# EAGLE board pcb v3 (EAGLE 9.7.0)
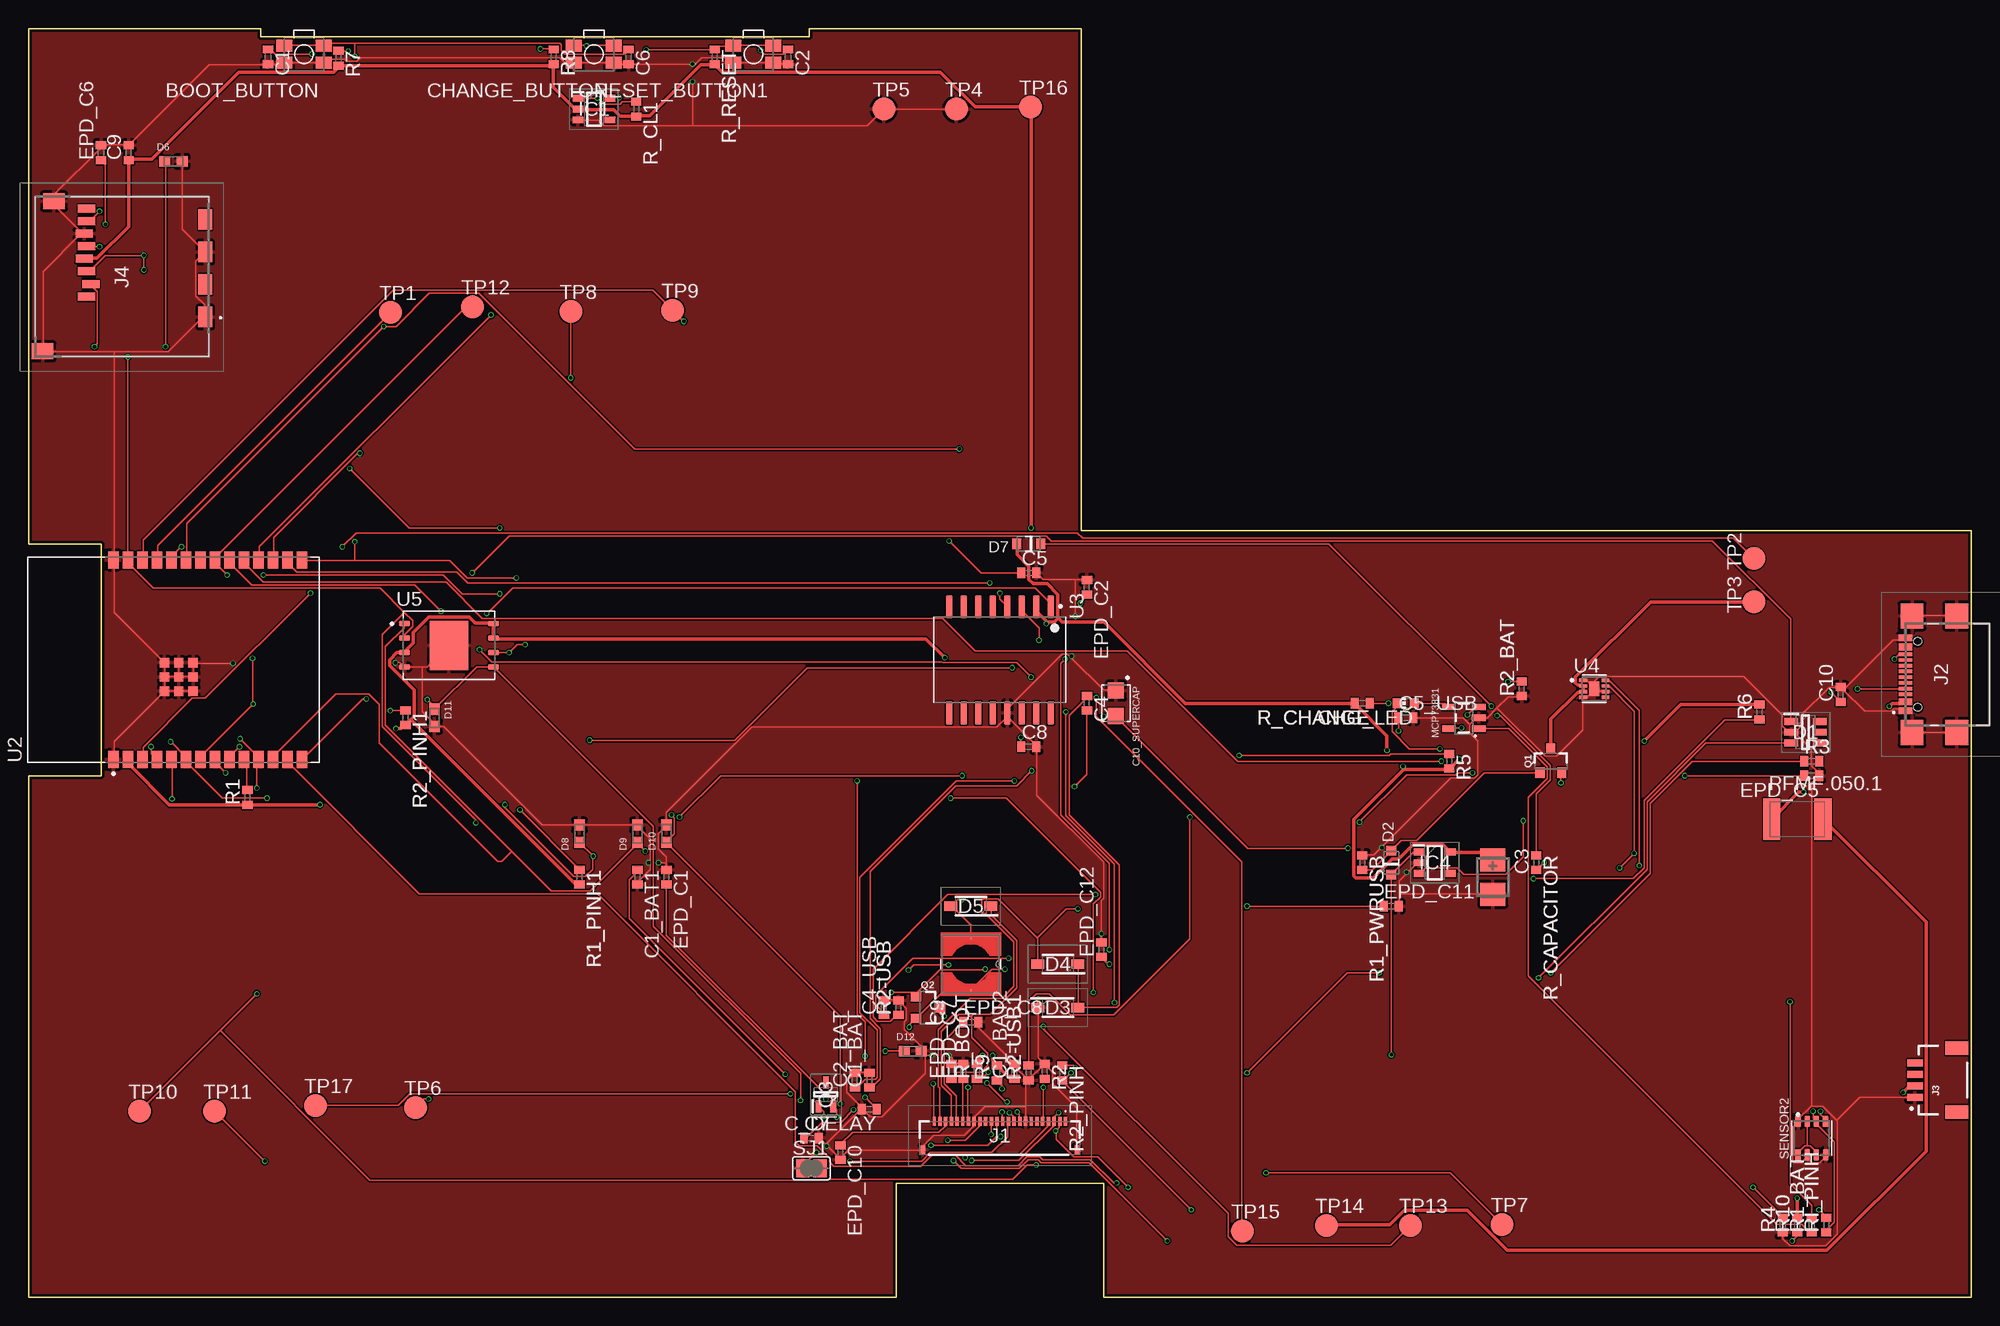
[diagram p0: board, top side]
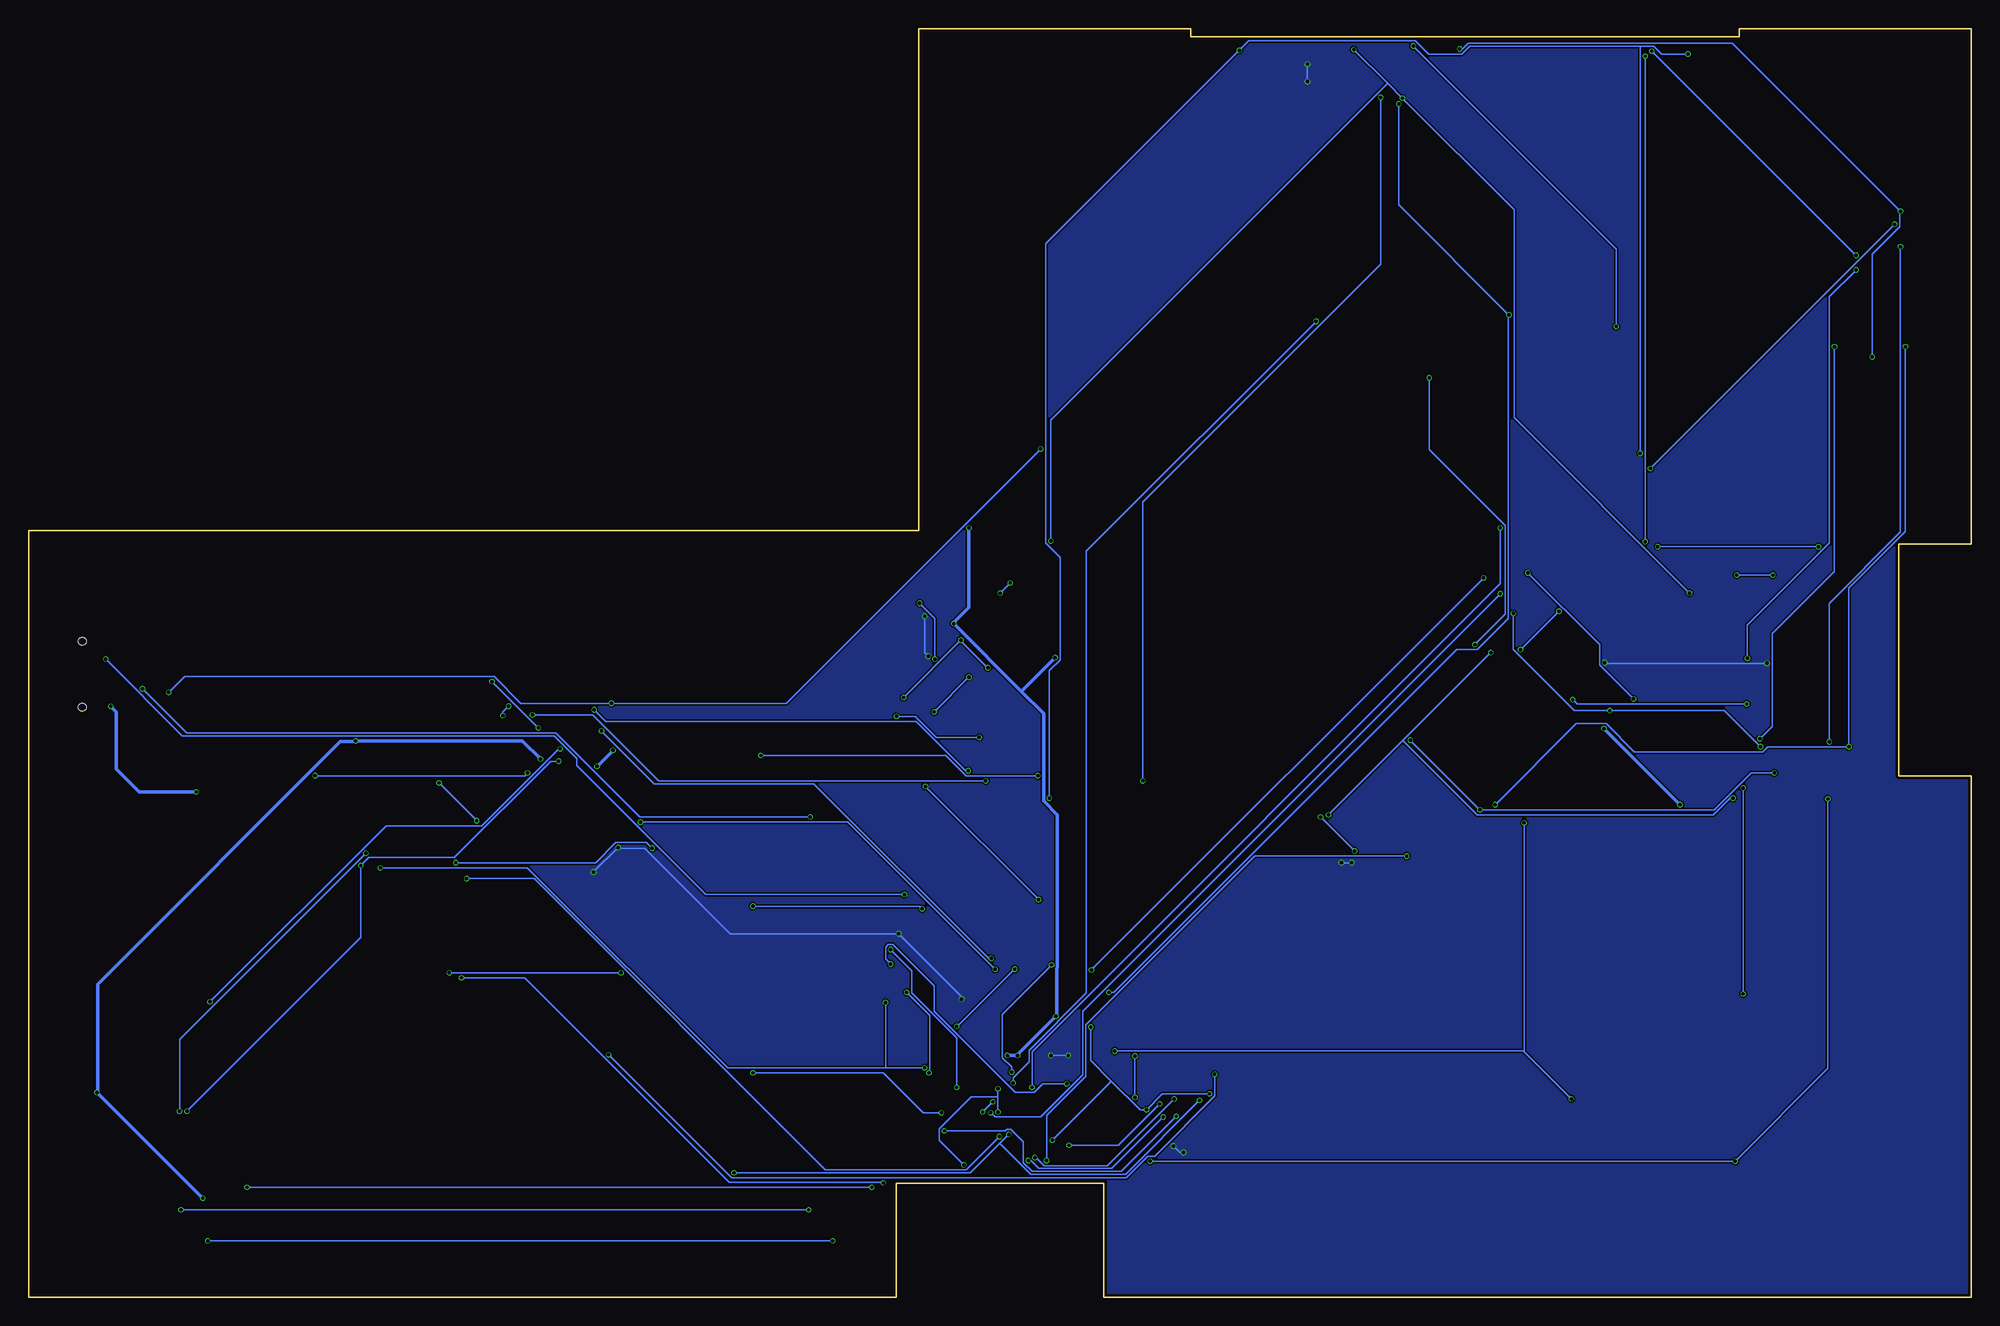
[diagram p1: board, bottom side, seen from below]

Size 170.2 x 111.2 mm. Coordinates in mm from the lower left corner, seen from the top.
Outline: 0,111.2 0,66.04 6.35,66.04 6.35,45.72 0,45.72 0,0 76,0 76,10 94.2,10 94.2,0 170.2,0 170.2,67.2 92.2,67.2 92.2,111.2 68.39,111.2 68.39,110.49 20.32,110.49 20.32,111.2 0,111.2
Copper layers (1*16): Top 0.035mm / dielectric 1.6mm / Bottom 0.035mm
Design rules "jlcpcb-2layers.dru": minimum track width 5mil, minimum drill 0.3mm, track to track 5mil, track to pad 5mil, pad to pad 5mil, via to via 5mil, smd to smd 5mil, copper to edge 0.2mm, drill to drill 6mil, minimum pad ring 10mil, minimum via ring 3mil, stop-mask expansion 4mil, vias tented up to drill 0mil, thermal gap 10mil
Net classes: 1 traseedeputere: width 0.3 mm

## Footprints (pad centres in the part's own frame; a part is rotated, then mirrored left to right if it is on the bottom)
MYBUTTON = smd 1.4 x 1.05: 1 1.75,0.75; 2 -1.75,0.75; 3 -1.75,-0.75; 4 1.75,-0.75
ESP32_WROVER_EAGLE-LTSPICE_C0402 = smd 0.7 x 0.9: 1 -0.65,0; 2 0.65,0
EAGLE-LTSPICE_C0402 = smd 0.7 x 0.9: 1 -0.65,0; 2 0.65,0
RCL_CT3528 = smd 2 x 2.2: + -1.5,0; - 1.5,0
CAPCP3225X100N = smd 1.4 x 1.4: 1 -1.1,0; 2 1.1,0
ADAFRUIT_CHIP-LED0603 = smd 0.8 x 0.8: A 0,-0.75; C 0,0.75
SOT95P280X145-6N = smd 1.2 x 0.6: 1 -1.25,0.95; 2 -1.25,0; 3 -1.25,-0.95; 4 1.25,-0.95; 5 1.25,0; 6 1.25,0.95
ESP32_WROVER_AVX---SD0805S020S1R0_AVX_SD0805S020S1R0_0 = smd 0.8 x 0.9: 1 -1.05,0; 2 1.05,0
SOD3716X135N = smd 1.15 x 0.8: 1 -1.75,0; 2 1.75,0
DIOC1608X36N = smd 0.97 x 0.94: 1 -0.75,0; 2 0.75,0
SOT95P280X120-5N = smd 0.9 x 0.6: 1 -1.4,0.95; 2 -1.4,0; 3 -1.4,-0.95; 4 1.4,-0.95; 5 1.4,0.95
FH34SRJ24S05SH99 = smd 0.3 x 0.8: 1 5.75,1.45; 2 5.25,1.45; 3 4.75,1.45; 4 4.25,1.45; 5 3.75,1.45; 6 3.25,1.45; 7 2.75,1.45; 8 2.25,1.45; 9 1.75,1.45; 10 1.25,1.45; 11 0.75,1.45; 12 0.25,1.45; 13 -0.25,1.45; 14 -0.75,1.45; 15 -1.25,1.45; 16 -1.75,1.45; 17 -2.25,1.45; 18 -2.75,1.45; 19 -3.25,1.45; 20 -3.75,1.45; 21 -4.25,1.45; 22 -4.75,1.45; 23 -5.25,1.45; 24 -5.75,1.45 | smd 0.4 x 0.8: MP1 6.75,-1.05; MP2 -6.75,-1.05
SAMACSYS_PARTS_USB4110GFA = smd 0.3 x 1.15: A1 -3.35,3.678; A4 -2.55,3.678; A5 -1.25,3.678; A6 -0.25,3.678; A7 0.25,3.678; A8 1.25,3.678; A9 2.55,3.678; A12 3.35,3.678; B1 3.05,3.678; B4 2.25,3.678; B5 1.75,3.678; B6 0.75,3.678; B7 -0.75,3.678; B8 -1.75,3.678; B9 -2.25,3.678; B12 -3.05,3.678 | smd 2.18 x 2: MP1 -5.11,-0.827; MP2 5.11,-0.827; MP3 -5.11,3.103; MP4 5.11,3.103 | hole 0.65: -2.89,2.603; 2.89,2.603
JST04_1MM_RA = smd 0.6 x 1.35: 1 -1.5,0; 2 -0.5,0; 3 0.5,0; 4 1.5,0 | smd 1.2 x 2: NC1 2.8,-3.675; NC2 -2.8,-3.675
112ATAARR03ATTEND = smd 1.8 x 1.2: G1 10.6,10.4; G2 4.9,10.4; S1 7.75,10.4; S2 2.05,10.4 | smd 1.4 x 1.9: G3 13.6,-3.85; G4 0.45,-2.85 | smd 0.7 x 1.5: P1 8.8,0; P2 7.7,0.4; P3 6.6,0; P4 5.5,-0.2; P5 4.4,0; P6 3.3,-0.2; P7 2.2,0; P8 1.1,0
IND_4828-WE-TPC_WRE = smd 0.127 x 0.127: 1 -2.286,0; 2 2.286,0
ESP32_WROVER_SPARKFUN-IC-POWER_SOT23-5 = smd 0.55 x 1.2: 1 -0.95,-1.3; 2 0,-1.3; 3 0.95,-1.3; 4 0.95,1.3; 5 -0.95,1.3
ESP32C6_VARISTOR_CT/CN1812 = smd 1.5 x 3.6: 1 -2.25,0; 2 2.25,0
ESP32_WROVER_SPARKFUN-DISCRETESEMI_SOT23-3 = smd 0.8 x 0.9: 1 -0.95,-1; 2 0.95,-1; 3 0,1.1
SOT65P210X110-3N = smd 1.05 x 0.5: 1 -1.05,0.65; 2 -1.05,-0.65; 3 1.05,0
ESP32_WROVER_EAGLE-LTSPICE_R0402 = smd 0.7 x 0.9: 1 -0.65,0; 2 0.65,0
ESP32_WROVER_BME680_PSON80P300X300X100-8N = smd 1.016 x 0.5: 1 1.458,1.2; 2 1.458,0.4; 3 1.458,-0.4; 4 1.458,-1.2; 5 -1.458,-1.22; 6 -1.458,-0.4; 7 -1.458,0.4; 8 -1.458,1.2
SJ = smd 1.168 x 1.6: 1 -0.762,0; 2 0.762,0
TP20R = smd 2 x 2: TP 0,0
XCVR_ESP32-C6-WROOM-1-N8 = smd 1.5 x 0.9: 1 -8.75,5.26; 2 -8.75,3.99; 3 -8.75,2.72; 4 -8.75,1.45; 5 -8.75,0.18; 6 -8.75,-1.09; 7 -8.75,-2.36; 8 -8.75,-3.63; 9 -8.75,-4.9; 10 -8.75,-6.17; 11 -8.75,-7.44; 12 -8.75,-8.71; 13 -8.75,-9.98; 14 -8.75,-11.25; 15 8.75,-11.25; 16 8.75,-9.98; 17 8.75,-8.71; 18 8.75,-7.44; 19 8.75,-6.17; 20 8.75,-4.9; 21 8.75,-3.63; 22 8.75,-2.36; 23 8.75,-1.09; 24 8.75,0.18; 25 8.75,1.45; 26 8.75,2.72; 27 8.75,3.99; 28 8.75,5.26 | smd 0.8 x 0.8: 29_1 -2.755,0.79; 29_2 -1.505,0.79; 29_3 -0.255,0.79; 29_4 -2.755,-0.46; 29_5 -1.505,-0.46; 29_6 -0.255,-0.46; 29_7 -2.755,-1.71; 29_8 -1.505,-1.71; 29_9 -0.255,-1.71
SOIC127P1032X265-16N = smd 2.05 x 0.59: 1 -4.655,4.445; 2 -4.655,3.175; 3 -4.655,1.905; 4 -4.655,0.635; 5 -4.655,-0.635; 6 -4.655,-1.905; 7 -4.655,-3.175; 8 -4.655,-4.445; 9 4.655,-4.445; 10 4.655,-3.175; 11 4.655,-1.905; 12 4.655,-0.635; 13 4.655,0.635; 14 4.655,1.905; 15 4.655,3.175; 16 4.655,4.445
SON50P200X200X80-9N = smd 0.76 x 0.27: 1 -0.985,0.75; 2 -0.985,0.25; 3 -0.985,-0.25; 4 -0.985,-0.75; 5 0.985,-0.75; 6 0.985,-0.25; 7 0.985,0.25; 8 0.985,0.75 | smd 0.9 x 1.3: 9 0,0
SON127P600X800X80-9N = smd 0.94 x 0.44: 1 -3.895,1.905; 2 -3.895,0.635; 3 -3.895,-0.635; 4 -3.895,-1.905; 5 3.895,-1.905; 6 3.895,-0.635; 7 3.895,0.635; 8 3.895,1.905 | smd 3.4 x 4.3: 9 0,0

## Placement (x,y rotation side)
BOOT_BUTTON  [MYBUTTON]  24.13,108.94 180 top
C1  100nF  [ESP32_WROVER_EAGLE-LTSPICE_C0402]  20.97,108.71 270 top
C1_BAT  4.7uF  [ESP32_WROVER_EAGLE-LTSPICE_C0402]  73.66,19.05 90 top
C1_BAT1  4.7uF  [EAGLE-LTSPICE_C0402]  53.34,36.83 270 top
C1_BAT2  4.7uF  [ESP32_WROVER_EAGLE-LTSPICE_C0402]  86.36,19.82 90 top
C2  100nF  [ESP32_WROVER_EAGLE-LTSPICE_C0402]  66.53,108.71 270 top
C2_BAT  4.7uF  [ESP32_WROVER_EAGLE-LTSPICE_C0402]  72.39,19.05 90 top
C3  100uF TANT  [RCL_CT3528]  128.27,36.83 270 top
C4  4.7uF/25V  [ESP32_WROVER_EAGLE-LTSPICE_C0402]  92.71,52.07 270 top
C4_USB  100nF  [EAGLE-LTSPICE_C0402]  74.93,25.4 90 top
C5  1uF  [ESP32_WROVER_EAGLE-LTSPICE_C0402]  87.63,63.5 0 top
C5_USB  4.7uF  [EAGLE-LTSPICE_C0402]  120.65,50.8 0 top
C6  100nF  [ESP32_WROVER_EAGLE-LTSPICE_C0402]  52.56,108.71 270 top
C7  10uF  [ESP32_WROVER_EAGLE-LTSPICE_C0402]  68.58,13.97 0 top
C8  100nF  [ESP32_WROVER_EAGLE-LTSPICE_C0402]  87.63,48.26 0 top
C9  100nF  [EAGLE-LTSPICE_C0402]  8.78,100.32 90 top
C10  100nF  [ESP32_WROVER_EAGLE-LTSPICE_C0402]  158.75,52.84 90 top
C10_SUPERCAP  CPH3225A  [CAPCP3225X100N]  95.25,52.07 270 top
C_DELAY  100nF  [ESP32_WROVER_EAGLE-LTSPICE_C0402]  73.66,16.51 180 top
CHANGE_BUTTON  [MYBUTTON]  49.53,108.94 180 top
CHG_LED  [ADAFRUIT_CHIP-LED0603]  120.65,52.07 90 top
D1  USBLC6-2SC6Y  [SOT95P280X145-6N]  155.67,49.53 0 top
D2  ESP32_WROVER_AVX---SD0805S020S1R0_AVX_SD0805S020S1R0_0_0AVX_SD0805S020S1R0_0_0  [ESP32_WROVER_AVX---SD0805S020S1R0_AVX_SD0805S020S1R0_0]  119.38,38.1 90 top
D3  MBR0530  [SOD3716X135N]  90.17,25.4 0 top
D4  MBR0530  [SOD3716X135N]  90.17,29.21 180 top
D5  MBR0530  [SOD3716X135N]  82.55,34.29 180 top
D6  PGB1010603MR  [DIOC1608X36N]  12.7,99.56 0 top
D7  ESP32_WROVER_AVX---SD0805S020S1R0_AVX_SD0805S020S1R0_0_0AVX_SD0805S020S1R0_0_0  [ESP32_WROVER_AVX---SD0805S020S1R0_AVX_SD0805S020S1R0_0]  87.63,66.04 180 top
D8  PGB1010603MR  [DIOC1608X36N]  48.26,40.64 90 top
D9  PGB1010603MR  [DIOC1608X36N]  53.34,40.64 90 top
D10  PGB1010603MR  [DIOC1608X36N]  55.88,40.64 90 top
D11  PGB1010603MR  [DIOC1608X36N]  35.56,50.8 270 top
D12  PGB1010603MR  [DIOC1608X36N]  77.47,21.59 0 top
EPD_C1  1uF/50V  [ESP32_WROVER_EAGLE-LTSPICE_C0402]  55.88,36.83 270 top
EPD_C2  1uF/50V  [ESP32_WROVER_EAGLE-LTSPICE_C0402]  92.71,62.23 270 top
EPD_C5  01uf/50V  [ESP32_WROVER_EAGLE-LTSPICE_C0402]  156.21,45.72 180 top
EPD_C6  1uF/50V  [ESP32_WROVER_EAGLE-LTSPICE_C0402]  6.35,100.33 90 top
EPD_C7  1uF/50V  [ESP32_WROVER_EAGLE-LTSPICE_C0402]  81.89,19.82 90 top
EPD_C8  1uF/50V  [ESP32_WROVER_EAGLE-LTSPICE_C0402]  82.55,24.13 0 top
EPD_C9  1uF/50V  [ESP32_WROVER_EAGLE-LTSPICE_C0402]  80.86,19.82 90 top
EPD_C10  1uf/50V  [ESP32_WROVER_EAGLE-LTSPICE_C0402]  71.12,12.7 270 top
EPD_C11  1uF/50V  [ESP32_WROVER_EAGLE-LTSPICE_C0402]  119.38,34.29 0 top
EPD_C12  1uF/50V  [ESP32_WROVER_EAGLE-LTSPICE_C0402]  93.98,30.48 90 top
IC1  BD5229G-TR  [SOT95P280X120-5N]  49.53,104.14 0 top
IC4  XC6220A331MR-G  [SOT95P280X120-5N]  123.19,38.1 0 top
J1  FH34SRJ-24S-0.5SH_99_  [FH34SRJ24S05SH99]  85.09,13.97 0 top
J2  SAMACSYS_PARTS_USB4110-GF-A  [SAMACSYS_PARTS_USB4110GFA]  168.1,54.61 90 top
J3  QWIIC_RIGHT_ANGLE  [JST04_1MM_RA]  165.25,19.05 90 top
J4  112A-TAAR-R03_ATTEND  [112ATAARR03ATTEND]  5.08,96.52 270 top
L1  68uH  [IND_4828-WE-TPC_WRE]  82.55,29.21 270 top
MCP73831  ESP32_WROVER_SPARKFUN-IC-POWER_MCP73831  [ESP32_WROVER_SPARKFUN-IC-POWER_SOT23-5]  125.73,50.8 90 top
PFMF.050.1  ESP32C6_VARISTORCN1812  [ESP32C6_VARISTOR_CT/CN1812]  154.94,41.91 0 top
Q1  20V/4.2A/52mΩ/1.4W  [ESP32_WROVER_SPARKFUN-DISCRETESEMI_SOT23-3]  133.35,46.99 0 top
Q2  20V/4.2A/52mΩ/1.4W  [ESP32_WROVER_SPARKFUN-DISCRETESEMI_SOT23-3]  78.74,25.4 270 top
Q3  SI1308EDL-T1-GE3  [SOT65P210X110-3N]  69.85,17.78 90 top
R1  10k  [ESP32_WROVER_EAGLE-LTSPICE_R0402]  19.17,43.82 90 top
R1_BAT  200  [ESP32_WROVER_EAGLE-LTSPICE_R0402]  156.21,6.35 90 top
R1_PINH1  10K  [ESP32_WROVER_EAGLE-LTSPICE_R0402]  48.26,36.83 270 top
R1_PWRUSB  100k  [ESP32_WROVER_EAGLE-LTSPICE_R0402]  116.84,38.1 270 top
R2  2.2  [ESP32_WROVER_EAGLE-LTSPICE_R0402]  89.02,19.82 270 top
R2-USB  5k1  [ESP32_WROVER_EAGLE-LTSPICE_R0402]  76.2,25.4 90 top
R2-USB1  5k1  [ESP32_WROVER_EAGLE-LTSPICE_R0402]  87.6,19.69 90 top
R2_BAT  2k  [ESP32_WROVER_EAGLE-LTSPICE_R0402]  130.81,53.34 90 top
R2_PINH  10K  [ESP32_WROVER_EAGLE-LTSPICE_R0402]  90.55,19.68 270 top
R2_PINH1  10K  [ESP32_WROVER_EAGLE-LTSPICE_R0402]  33.02,50.8 270 top
R3  0.47  [ESP32_WROVER_EAGLE-LTSPICE_R0402]  156.21,46.99 0 top
R4  10K  [ESP32_WROVER_EAGLE-LTSPICE_R0402]  153.67,6.35 90 top
R5  10K  [ESP32_WROVER_EAGLE-LTSPICE_R0402]  124.46,46.99 270 top
R6  10K  [ESP32_WROVER_EAGLE-LTSPICE_R0402]  151.63,51.3 90 top
R7  10K  [ESP32_WROVER_EAGLE-LTSPICE_R0402]  27.16,108.61 270 top
R8  10K  [ESP32_WROVER_EAGLE-LTSPICE_R0402]  46,108.71 270 top
R9  10K  [ESP32_WROVER_EAGLE-LTSPICE_R0402]  84.83,19.69 90 top
R10  10K  [ESP32_WROVER_EAGLE-LTSPICE_R0402]  154.94,6.35 90 top
R_BOOT  10K  [ESP32_WROVER_EAGLE-LTSPICE_R0402]  83.09,19.82 90 top
R_CAPACITOR  15  [ESP32_WROVER_EAGLE-LTSPICE_R0402]  132.08,38.1 270 top
R_CHANGE  10K  [ESP32_WROVER_EAGLE-LTSPICE_R0402]  116.84,52.07 180 top
R_CL1  10K  [ESP32_WROVER_EAGLE-LTSPICE_R0402]  53.23,104.13 270 top
R_RESET  10K  [ESP32_WROVER_EAGLE-LTSPICE_R0402]  60.1,108.71 270 top
RESET_BUTTON1  [MYBUTTON]  63.5,108.94 180 top
RI_PINH  10K  [ESP32_WROVER_EAGLE-LTSPICE_R0402]  157.48,6.35 90 top
SENSOR2  BME688  [ESP32_WROVER_BME680_PSON80P300X300X100-8N]  156.21,13.97 90 top
SJ1  [SJ]  68.58,11.32 0 top
TP1  TPTP20R  [TP20R]  31.71,86.32 0 top
TP2  TPTP20R  [TP20R]  151.13,64.77 90 top
TP3  TPTP20R  [TP20R]  151.13,60.96 90 top
TP4  TPTP20R  [TP20R]  81.28,104.14 0 top
TP5  TPTP20R  [TP20R]  74.93,104.14 0 top
TP6  TPTP20R  [TP20R]  33.9,16.64 0 top
TP7  TPTP20R  [TP20R]  129.09,6.4 0 top
TP8  TPTP20R  [TP20R]  47.51,86.4 0 top
TP9  TPTP20R  [TP20R]  56.43,86.51 0 top
TP10  TPTP20R  [TP20R]  9.74,16.32 0 top
TP11  TPTP20R  [TP20R]  16.29,16.32 0 top
TP12  TPTP20R  [TP20R]  38.89,86.82 0 top
TP13  TPTP20R  [TP20R]  121.04,6.32 0 top
TP14  TPTP20R  [TP20R]  113.69,6.32 0 top
TP15  TPTP20R  [TP20R]  106.34,5.82 0 top
TP16  TPTP20R  [TP20R]  87.77,104.32 0 top
TP17  TPTP20R  [TP20R]  25.14,16.82 0 top
U2  ESP32-C6-WROOM-1-N8  [XCVR_ESP32-C6-WROOM-1-N8]  12.7,55.88 90 top
U3  DS3231SN#  [SOIC127P1032X265-16N]  85.09,55.88 270 top
U4  MAX17048G+T10  [SON50P200X200X80-9N]  137.16,53.34 0 top
U5  W25Q512JVEIQ  [SON127P600X800X80-9N]  36.83,57.15 0 top

## Library data of the parts
BOOT_BUTTON CHANGE_BUTTON CHG_LED PFMF.050.1 RESET_BUTTON1 SJ1 TP1-TP17 = DeskAssistant v19 v1
C1 C1_BAT C1_BAT1 C1_BAT2 C2 C2_BAT C4 C4_USB C5 C5_USB C6-C10 C_DELAY EPD_C1 EPD_C2 EPD_C5-EPD_C12 = DeskAssistant v19 v1; SPICEMODEL: NONE; SPICEPREFIX: C
C3 = DeskAssistant v19 v1; SPICEPREFIX: C
C10_SUPERCAP = DeskAssistant v19 v1; AVAILABILITY: Not in stock; CHECK_PRICES: https://www.snapeda.com/parts/CPH3225A/Seiko+Instruments/view-part/?ref=eda; DESCRIPTION: 11 mF (EDLC) Supercapacitor 3.3 V 1210 (3225 Metric) - -; MF: Seiko Instruments; MP: CPH3225A; PACKAGE: 1210 Seiko; PRICE: None; PURCHASE-URL: https://www.snapeda.com/api/url_track_click_mouser/?unipart_id=562593&manufacturer=Seiko Instruments&part_name=CPH3225A&search_term=None; SNAPEDA_LINK: https://www.snapeda.com/parts/CPH3225A/Seiko+Instruments/view-part/?ref=snap
D1 = DeskAssistant v19 v1; AVAILABILITY: In Stock; CHECK_PRICES: https://www.snapeda.com/parts/USBLC6-2SC6Y/STMicroelectronics/view-part/?ref=eda; DESCRIPTION: 17V Clamp 5A (8/20µs) Ipp Tvs Diode Surface Mount SOT-23-6; MF: STMicroelectronics; MP: USBLC6-2SC6Y; PACKAGE: SOT-23-6 STMicroelectronics; PRICE: None; SNAPEDA_LINK: https://www.snapeda.com/parts/USBLC6-2SC6Y/STMicroelectronics/view-part/?ref=snap
D2 D7 = DeskAssistant v19 v1; CENTROID_NOT_SPECIFIED: No; DATASHEET: http://datasheets.avx.com/schottky.pdf; DIGIKEY_DESCRIPTION: DIODE SCHOTTKY 20V 1A 0805; DIGIKEY_PART_NUMBER: 478-7800-1-ND; LEAD_FREE: yes; MF: AVX; MOUSER_PART_NUMBER: 581-SD0805S020S1R0; PACKAGE: 0805 (2012 metric); PREFIX: D; ROHS: yes; TEMPERATURE_RANGE_HIGH: +125°C; TEMPERATURE_RANGE_LOW: -55°C
D3-D5 = DeskAssistant v19 v1; AVAILABILITY: In Stock; CHECK_PRICES: https://www.snapeda.com/parts/MBR0530/Onsemi/view-part/?ref=eda; DESCRIPTION: Diode Schottky 30 V 500mA Surface Mount SOD-123; MF: ON Semiconductor; MP: MBR0530; PACKAGE: SOD-123-2 ON Semiconductor; PRICE: None; PURCHASE-URL: https://www.snapeda.com/api/url_track_click_mouser/?unipart_id=179458&manufacturer=ON Semiconductor&part_name=MBR0530&search_term=None; SNAPEDA_LINK: https://www.snapeda.com/parts/MBR0530/Onsemi/view-part/?ref=snap
D6 D8-D12 = DeskAssistant v19 v1; AVAILABILITY: In Stock; CHECK_PRICES: https://www.snapeda.com/parts/PGB1010603MR/Littelfuse/view-part/?ref=eda; DESCRIPTION: 150V (Typ) Clamp - Ipp Tvs Diode Surface Mount 0603 (1608 Metric); MF: Littelfuse Inc.; MP: PGB1010603MR; PACKAGE: 0603 Littelfuse Inc.; PRICE: None; PURCHASE-URL: https://www.snapeda.com/api/url_track_click_mouser/?unipart_id=5659453&manufacturer=Littelfuse Inc.&part_name=PGB1010603MR&search_term=None; SNAPEDA_LINK: https://www.snapeda.com/parts/PGB1010603MR/Littelfuse/view-part/?ref=snap
IC1 IC4 = DeskAssistant v19 v1; DESCRIPTION: LDO Voltage Regulators; HEIGHT: 1.2mm; MANUFACTURER_NAME: Torex; MANUFACTURER_PART_NUMBER: XC6220A331MR-G; MOUSER_PART_NUMBER: 865-XC6220A331MR-G; MOUSER_PRICE-STOCK: https://www.mouser.co.uk/ProductDetail/Torex-Semiconductor/XC6220A331MR-G?qs=AsjdqWjXhJ8ZSWznL1J0gg%3D%3D
J1 = DeskAssistant v19 v1; DESCRIPTION: 24 Position FFC, FPC Connector Contacts, Top and Bottom 0.020" (0.50mm) Surface Mount, Right Angle; HEIGHT: 1.1mm; MANUFACTURER_NAME: Hirose; MANUFACTURER_PART_NUMBER: FH34SRJ-24S-0.5SH(99); MOUSER_PART_NUMBER: 798-FH34SRJ24S05SH99; MOUSER_PRICE-STOCK: https://www.mouser.co.uk/ProductDetail/Hirose-Connector/FH34SRJ-24S-0.5SH99?qs=vcbW%252B4%252BSTIpKBl5ap9J8Fw%3D%3D
J2 = DeskAssistant v19 v1; DESCRIPTION: CONN USB 2.0 TYPE-C R/A SMT; HEIGHT: 3.26mm; MANUFACTURER_NAME: GCT (GLOBAL CONNECTOR TECHNOLOGY); MANUFACTURER_PART_NUMBER: USB4110-GF-A; MOUSER_PART_NUMBER: 640-USB4110-GF-A; MOUSER_PRICE-STOCK: https://www.mouser.co.uk/ProductDetail/GCT/USB4110-GF-A?qs=KUoIvG%2F9IlYiZvIXQjyJeA%3D%3D
J3 = DeskAssistant v19 v1; PROD_ID: CONN-13694
J4 = DeskAssistant v19 v1; DESCRIPTION: Micro SD Card Socket, Push-Push Type, Top Mount, SMT, H=1.83mm, 10u; HEIGHT: 1.9mm; MANUFACTURER_NAME: ATTEND; MANUFACTURER_PART_NUMBER: 112A-TAAR-R03 ATTEND
L1 = DeskAssistant v19 v1; COPYRIGHT: Copyright (C) 2024 Ultra Librarian. All rights reserved.; MANUFACTURER_PART_NUMBER: 744043680; MFR_NAME: Wurth Electronics
MCP73831 = DeskAssistant v19 v1; PROD_ID: IC-09995
Q1 Q2 = DeskAssistant v19 v1; PROD_ID: TRAN-14388
Q3 = DeskAssistant v19 v1; AVAILABILITY: In Stock; CHECK_PRICES: https://www.snapeda.com/parts/SI1308EDL-T1-GE3/Vishay+Siliconix/view-part/?ref=eda; DESCRIPTION: Si1308EDL-T1-GE3 N-channel MOSFET Transistor, 1.5 A, 30 V, 3-Pin SC-70 | Siliconix / Vishay SI1308EDL-T1-GE3; MF: Vishay Siliconix; MP: SI1308EDL-T1-GE3; PACKAGE: SOT-323 Vishay Semiconductor; PRICE: None; PURCHASE-URL: https://www.snapeda.com/api/url_track_click_mouser/?unipart_id=274603&manufacturer=Vishay Siliconix&part_name=SI1308EDL-T1-GE3&search_term=None; SNAPEDA_LINK: https://www.snapeda.com/parts/SI1308EDL-T1-GE3/Vishay+Siliconix/view-part/?ref=snap
R1 R1_BAT R1_PINH1 R1_PWRUSB R2 R2-USB R2-USB1 R2_BAT R2_PINH R2_PINH1 R3-R10 R_BOOT R_CAPACITOR R_CHANGE R_CL1 R_RESET RI_PINH = DeskAssistant v19 v1; SPICEMODEL: NONE; SPICEPREFIX: R
SENSOR2 = DeskAssistant v19 v1; AVAILABILITY: Unavailable; DESCRIPTION: Integrated Environmental Unit; MF: Bosch Sensortec; MP: BME680; PACKAGE: LGA-8 Bosch Tools; PRICE: None
U2 = DeskAssistant v19 v1; AVAILABILITY: In Stock; CHECK_PRICES: https://www.snapeda.com/parts/ESP32-C6-WROOM-1-N8/Espressif+Systems/view-part/?ref=eda; DESCRIPTION: Multiprotocol Modules ESP32-C6 module, Wi-Fi 6 in 2.4 GHz band, Bluetooth 5, Zigbee 3.0 and Thread. ESP34-WROOM Compatible - ENGINEERING SAMPLE; MF: Espressif Systems; MP: ESP32-C6-WROOM-1-N8; PACKAGE: None; PRICE: None; SNAPEDA_LINK: https://www.snapeda.com/parts/ESP32-C6-WROOM-1-N8/Espressif+Systems/view-part/?ref=snap
U3 = DeskAssistant v19 v1; AVAILABILITY: In Stock; CHECK_PRICES: https://www.snapeda.com/parts/DS3231SN%23/Analog+Devices/view-part/?ref=eda; DESCRIPTION: Extremely Accurate I²C-Integrated RTC/TCXO/Crystal; MF: Analog Devices; MP: DS3231SN#; PACKAGE: SOIC-16 Maxim; PRICE: None; PURCHASE-URL: https://www.snapeda.com/api/url_track_click_mouser/?unipart_id=99048&manufacturer=Analog Devices&part_name=DS3231SN#&search_term=None; SNAPEDA_LINK: https://www.snapeda.com/parts/DS3231SN%23/Analog+Devices/view-part/?ref=snap
U4 = DeskAssistant v19 v1; AVAILABILITY: In Stock; CHECK_PRICES: https://www.snapeda.com/parts/MAX17048G+T10/Analog+Devices/view-part/?ref=eda; DESCRIPTION: 3µA 1-Cell/2-Cell Fuel Gauge with ModelGauge; MF: Analog Devices; MP: MAX17048G+T10; PACKAGE: TDFN-8 Maxim; PRICE: None; PURCHASE-URL: https://www.snapeda.com/api/url_track_click_mouser/?unipart_id=329239&manufacturer=Analog Devices&part_name=MAX17048G+T10&search_term=None; SNAPEDA_LINK: https://www.snapeda.com/parts/MAX17048G+T10/Analog+Devices/view-part/?ref=snap
U5 = DeskAssistant v19 v1; AVAILABILITY: In Stock; CHECK_PRICES: https://www.snapeda.com/parts/W25Q512JVEIQ/Winbond+Electronics/view-part/?ref=eda; DESCRIPTION: FLASH - NOR Memory IC 512Mb (64M x 8) SPI - Quad I/O 133 MHz 8-WSON (8x6); MF: Winbond Electronics; MP: W25Q512JVEIQ; PACKAGE: Package; PRICE: None; SNAPEDA_LINK: https://www.snapeda.com/parts/W25Q512JVEIQ/Winbond+Electronics/view-part/?ref=snap

## Nets
3V3 [traseedeputere]: C1_BAT2.1 C3.+ C9.1 D7.2 IC1.2 IC4.5 J3.2 J4.P4 Q2.3 R1.1 R1_PINH1.2 R2_PINH1.2 R5.2 R6.2 R7.2 R8.2 R9.2 R10.2 R_BOOT.2 R_CHANGE.2 R_CL1.2 R_RESET.2 TP16.TP U2.2 U3.2 U5.3 U5.7 U5.8
32KHZ: R2_PINH1.1 U2.9 U3.1
DN: J2.A7
DP: J2.A6
EPD_3V3: C7.1 EPD_C5.2 J1.15 J1.16 L1.2 Q2.2 TP17.TP
EPD_3V3_C: Q2.1 R_CL1.1 TP13.TP U2.18
EPD_BUSY: J1.9 TP9.TP U2.26
EPD_CS: D6.1 J1.12 R9.1 TP10.TP U2.11
EPD_DC: J1.11 TP11.TP U2.5
EPD_RST: J1.10 TP12.TP U2.21
FLASH_CS: D9.1 R5.1 U2.12 U5.1
GDR: J1.2 Q3.1 R4.2
GND: BOOT_BUTTON.1 BOOT_BUTTON.2 C1.2 C1_BAT1.2 C1_BAT2.2 C1_BAT.2 C2.2 C2_BAT.2 C3.- C4_USB.2 C5.2 C5_USB.2 C6.2 C7.2 C8.2 C9.2 C10.2 C10_SUPERCAP.1 C_DELAY.2 CHANGE_BUTTON.1 CHANGE_BUTTON.2 D1.2 D3.1 D6.2 D8.2 D9.2 D10.2 D11.2 D12.2 EPD_C1.1 EPD_C2.1 EPD_C5.1 EPD_C6.2 EPD_C7.2 EPD_C8.2 EPD_C9.2 EPD_C10.2 EPD_C11.2 EPD_C12.2 IC1.3 IC4.2 J1.8 J1.17 J1.MP1 J1.MP2 J2.A1 J2.A12 J2.B1 J2.B12 J2.MP1 J2.MP2 J2.MP3 J2.MP4 J3.1 J4.G1 J4.G2 J4.G3 J4.G4 J4.P6 MCP73831.2 R1_PWRUSB.1 R2-USB1.1 R2-USB.2 R2.1 R2_BAT.1 R4.1 RESET_BUTTON1.1 RESET_BUTTON1.2 SENSOR2.1 SENSOR2.5 SENSOR2.7 SJ1.1 TP4.TP TP5.TP U2.1 U2.28 U2.29_1 U2.29_2 U2.29_3 U2.29_4 U2.29_5 U2.29_6 U2.29_7 U2.29_8 U2.29_9 U3.13 U4.1 U4.4 U4.6 U4.9 U5.4 U5.9
GPIO8: R1.2 U2.10
I2C_PW: C1.1 C2.1 R2_PINH.2 RI_PINH.2 U2.17
IC2_PW: SENSOR2.2 SENSOR2.6 SENSOR2.8
INT_RTC: R1_PINH1.1 TP15.TP U2.8 U3.3
IO/BOOT: BOOT_BUTTON.3 BOOT_BUTTON.4 C6.1 R_BOOT.1 U2.15
IO/CHANGE: C10.1 CHANGE_BUTTON.3 CHANGE_BUTTON.4 R_CHANGE.1 U2.23
MISO: D12.1 J4.P7 R8.1 TP6.TP U2.27 U5.2
MOSI: D11.1 J1.14 J4.P3 R7.1 TP7.TP U2.7 U5.5
N$1: J2.B5 R2-USB.1
N$2: J2.A5 R2-USB1.2
N$3: D1.4
N$4: D1.5
N$5: J2.B4
N$6: J2.B7
N$7: J2.B6
N$8: J2.B9
N$9: D1.6
N$10: C4_USB.1 C5_USB.1
N$11: J2.A9
N$12: D2.2 Q1.1 R1_PWRUSB.2
N$13: C1_BAT1.1 D2.1 IC4.1 IC4.3 Q1.2
N$14: MCP73831.1 R1_BAT.1
N$15: R2.2
N$16: C4.2 D5.2 L1.1
N$17: C4.1 D3.2 D4.1
N$18: CHG_LED.C R1_BAT.2
N$19: C1_BAT.1 CHG_LED.A MCP73831.4
N$20: MCP73831.5 R2_BAT.2
N$21: R3.2
N$22: EPD_C1.2 J1.4
N$23: EPD_C2.2 J1.5
N$24: EPD_C6.1 J1.18
N$26: EPD_C7.1 J1.19
N$29: EPD_C8.1 J1.20
N$30: EPD_C10.1 J1.22
N$31: EPD_C12.1 J1.24
N$32: C_DELAY.1 IC1.5
N$37: U3.14
N$43: U3.16
N$44: U3.15
N$45: D7.1 R_CAPACITOR.1
N$62: J3.3
N$63: J3.4
PREVGH: D5.1 EPD_C9.1 J1.21
PREVGL: D4.2 EPD_C11.1 J1.23
RESE: J1.3 Q3.2 R3.1
RESE': SJ1.2
RESET: C5.1 IC1.1 R_RESET.1 RESET_BUTTON1.3 RESET_BUTTON1.4 U2.3
RTC_RST: U2.16 U3.4
RX: TP2.TP U2.24
SCK: D10.1 J1.13 J4.P5 R6.1 TP8.TP U2.6 U5.6
SCL: R2_PINH.1 SENSOR2.4 U2.20 U4.7
SDA: RI_PINH.1 SENSOR2.3 U2.19 U4.8
SRC: Q3.3
SS_SD: D8.1 J4.P2 R10.1 U2.4
TX: TP1.TP U2.25
USB_D+: D1.1 U2.14
USB_D-: D1.3 U2.13
VBAT [traseedeputere]: Q1.3 TP3.TP U4.2 U4.3
VBBAT: C2_BAT.1 MCP73831.3
VBUS [traseedeputere]: PFMF.050.1.2 TP14.TP
VRTC: C8.1 C10_SUPERCAP.2 R_CAPACITOR.2
VUSB [traseedeputere]: J2.A4 PFMF.050.1.1

## Tracks (layer width: path | path; a pad name or v marks a point on that pad's centre or on a via)
3V3  (via drill 0.3)
  Top 0.3: J4.P4 4.89,91.06 5.97,91.06 8.76,93.85 8.76,99.63 C9.1 8.89,99.76 10.79,99.76 18.41,107.38 26.73,107.38 27.18,107.82 R7.2 27.18,107.95 45.91,107.95 45.97,108.01 R8.2 45.97,107.82 45.97,106.05 47.88,104.14 IC1.2 48.26,104.08 51.24,104.08 51.82,103.5 53.21,103.5 R_CL1.2 53.34,103.57 54.42,103.57 58.86,108.01 60.07,108.01 R_RESET.2 60.2,107.95 60.77,107.38 79.88,107.38 82.93,104.33 87.76,104.33 TP16.TP 87.82,104.2 v87.82,67.44 | v154.94,8.7 R10.2 | v164.21,17.97 164.78,18.54 165.23,18.54 J3.2 | C3.+ 128.27,38.35 127.64,38.99 124.65,38.99 IC4.5 124.46,39.12 123.89,39.69 121.28,39.69 120.02,38.42 119.44,38.42 117.79,36.77 116.27,36.77 116.08,36.96 116.08,41.91 120.46,46.29 | 120.46,46.29 124.46,46.29 R5.2 124.59,46.42 v125.35,47.18 | v141.54,48.77 144.72,51.94 151.57,51.94 R6.2 | U2.2 8.76,47.12 8.76,46.74 12.32,43.18 19.11,43.18 R1.1 19.3,43.18 v25.53,43.18 | 33.5,50.64 33.78,50.93 33.78,53.21 31.62,55.37 31.62,55.88 32.26,56.52 U5.3 33.02,56.64 33.72,57.34 33.72,58.29 35.05,59.63 38.61,59.63 39.12,59.12 40.58,59.12 U5.8 40.7,59.05 40.7,57.78 U5.7 40.83,57.72 78.61,57.72 v80.26,56.07 | 33.5,50.64 33.02,50.17 R2_PINH1.2 32.89,50.1 32.64,49.85 v32.19,49.85 | 33.5,50.64 47.94,36.2 48.26,36.2 R1_PINH1.2 | C1_BAT2.1 85.98,19.18 84.84,20.32 R9.2 84.77,20.45 84.45,20.77 v84.45,21.21 | v83.57,21.21 83.12,20.77 83.12,20.51 R_BOOT.2 | v80.2,24.64 79.88,24.96 79.88,25.4 Q2.3 | 90.17,59.5 90.17,61.59 89.22,62.55 88.01,62.55 87.63,62.93 87.63,64.07 86.61,65.09 86.61,66.04 D7.2 | 90.17,59.5 89.85,59.18 89.22,59.18 | 89.22,59.18 88.27,60.13 U3.2
  Top 0.3: 90.17,59.5 90.3,59.44 90.55,59.18 94.23,59.18 101.35,52.07 R_CHANGE.2 116.27,51.94 119,49.21 v119,47.94 | v89.15,59.05 89.22,59.18 | v120.4,46.55 120.4,46.42 120.46,46.29
  Bottom 0.3: v154.94,8.7 v164.21,17.97 164.15,18.1 164.15,27.43 142.88,48.7 141.67,48.7 v141.54,48.77 126.94,48.77 v125.35,47.18 | v32.19,49.85 v25.53,43.18 | v84.45,21.21 v83.57,21.21 83.5,21.34 v80.2,24.64 80.14,24.77 80.14,28.83 80.07,28.89 80.07,42.29 81.28,43.5 81.28,51.18 83.22,53.12 | 83.22,53.12 v89.15,59.05 89.09,59.18 87.82,60.45 v87.82,67.44 | 83.22,53.12 v80.26,56.07 | v119,47.94 v120.4,46.55
32KHZ  (via drill 0.3)
  Top 0.127: v31.69,51.44 33.02,51.44 R2_PINH1.1 | v18.48,48.26 17.65,47.44 17.65,47.18 U2.9 | U3.1 89.53,60.83 88.2,62.17 42.42,62.17 40.2,59.94 v40.13,59.94
  Bottom 0.127: v18.48,48.26 21.65,51.44 v31.69,51.44 34.8,51.44 40.13,56.77 v40.13,59.94
EPD_3V3  (via drill 0.3)
  Top 0.127: J1.15 83.82,15.43 83.38,15.43 J1.16 83.31,15.37 83.31,15.05 82.04,13.78 v80.52,13.78 | C7.1 68.14,13.97 69.53,15.37 71.18,15.37 v72.26,16.45 | v77.15,23.69 77.15,23.88 77.72,24.45 Q2.2 77.79,24.51 80.2,26.92 L1.2 84.38,28.76 v85.53,28.76 | v66.74,17.84 33.4,17.84 32.38,16.83 TP17.TP | v145.1,45.72 EPD_C5.2 | v126.49,45.97 125.22,45.97 125.03,45.78 120.71,45.78 v116.59,41.66
  Bottom 0.127: 75.34,18.96 77.15,20.77 v77.15,23.69 | 75.34,18.96 72.83,16.45 v72.26,16.45 70.87,17.84 v66.74,17.84 | 75.34,18.96 v80.52,13.78 | v145.1,45.72 126.75,45.72 v126.49,45.97 | v116.59,41.66 98.42,41.66 v85.53,28.76
EPD_3V3_C  (via drill 0.3)
  Top 0.127: v88.9,23.75 88.9,23.56 105.09,7.37 105.09,5.33 105.86,4.57 119.32,4.57 121.03,6.29 TP13.TP | v50.16,104.58 51.82,104.58 52.01,104.77 53.21,104.77 R_CL1.1 | v40.51,86.11 20.19,65.79 20.19,64.64 U2.18 | v75.56,26.73 77.79,26.73 Q2.1 77.79,26.35 77.79,26.67 79.82,28.7 83.74,28.7 v83.81,28.77
  Bottom 0.127: v88.9,23.75 88.84,23.75 v83.81,28.77 | v50.16,104.58 50.16,95.76 v40.51,86.11 40.58,86.11 40.58,59.5 43.31,56.77 45.09,56.77 75.12,26.73 v75.56,26.73
EPD_BUSY  (via drill 0.3)
  Top 0.127: v86.61,16.26 86.81,16.07 86.81,15.43 J1.9 | v85.72,17.14 85.6,17.14 v83.95,18.8 | v57.4,85.53 56.45,86.49 TP9.TP 56.39,86.55 54.67,88.27 31.94,88.27 10.03,66.36 10.03,64.64 U2.26
  Bottom 0.127: v85.72,17.14 v86.61,16.26 | v83.95,18.8 83.95,19.24 82.55,20.64 82.55,21.65 77.53,26.67 77.53,65.41 v57.4,85.53
EPD_CS  (via drill 0.3)
  Top 0.127: v85.28,16.26 85.28,15.43 J1.12 | v85.28,18.29 85.28,18.54 84.84,18.99 R9.1 | v12,83.31 12,99.5 D6.1 | v18.54,48.96 20.13,47.37 20.13,47.18 U2.11 20.13,47.12 20,46.99 v20,44.64 | v20,26.61 16.8,23.4 | 16.8,23.4 9.78,16.38 TP10.TP | v88.27,11.62 87.5,11.62 86.23,10.35 70.04,10.35 69.98,10.29 29.91,10.29 16.8,23.4
  Bottom 0.127: v85.28,18.29 85.28,17.59 | 85.28,17.59 v85.28,16.26 | v12,83.31 12,63.63 17.46,58.17 17.46,50.04 v18.54,48.96 | v20,44.64 v20,26.61 | 85.28,17.59 87.63,17.59 90.42,14.8 90.42,13.78 v88.27,11.62
EPD_DC  (via drill 0.3)
  Top 0.127: v71.94,11.94 78.23,11.94 78.99,12.7 84.39,12.7 85.79,14.1 85.79,15.37 J1.11 | v20.7,11.94 16.32,16.32 TP11.TP | v12.57,43.69 12.57,47.12 U2.5
  Bottom 0.127: v71.94,11.94 v20.7,11.94 12.57,20.07 v12.57,43.69
EPD_RST  (via drill 0.3)
  Top 0.127: v85.92,16.19 86.3,15.81 86.3,15.43 J1.10 | v41.27,61.66 37.97,61.66 36.32,63.31 v20.57,63.31 | v17.4,63.31 16.38,64.33 16.38,64.58 U2.21 16.38,64.64 16.38,64.9 38.29,86.8 38.86,86.8 TP12.TP
  Bottom 0.127: v85.92,16.19 85.53,15.81 81.53,15.81 77.85,19.49 77.85,25.08 v41.27,61.66 | v17.4,63.31 v20.57,63.31
FLASH_CS  (via drill 0.3)
  Top 0.127: v106.05,47.5 119.19,47.5 119.32,47.62 124.46,47.62 R5.1 | v81.79,45.72 60.64,45.72 v57.02,42.1 | v54.04,39.12 53.34,39.81 D9.1 53.34,39.75 49.21,35.62 45.78,35.62 42.32,39.08 | 42.32,39.08 31.24,50.17 31.24,57.02 32.89,58.67 32.89,59.05 U5.1 | 42.32,39.08 41.47,38.23 41.08,38.23 30.73,48.58 30.73,51.94 29.78,52.9 26.92,52.9 21.46,47.44 21.46,47.18 U2.12
  Bottom 0.127: v106.05,47.5 89.85,47.5 88.08,45.72 v81.79,45.72 | v54.04,39.12 v57.02,42.1
GDR  (via drill 0.3)
  Top 0.127: v69.66,15.88 69.66,16.26 69.22,16.7 Q3.1 | J1.2 90.3,15.37 90.3,14.92 v89.98,14.61 90.04,14.61 90.04,13.84 91.57,12.32 93.66,12.32 v96.33,9.65 | v151.07,9.65 153.67,7.05 R4.2
  Bottom 0.127: v89.98,14.61 84.64,14.61 84.52,14.73 84.14,14.73 83.06,13.65 83.06,11.81 82.3,11.05 74.49,11.05 v69.66,15.88 | v96.33,9.65 v151.07,9.65
GND  (via drill 0.3)
  Top 0.127: 58.17,102.68 73.47,102.68 TP5.TP TP4.TP | 58.17,102.68 50.42,102.68 49.91,103.19 IC1.3 | U2.29_1 11.94,53.15 11.94,54.36 U2.29_2 | U2.29_2 11.94,54.42 11.94,55.56 U2.29_3 11.87,55.63 7.49,60.01 7.49,64.58 U2.28 7.49,64.64 7.49,82.87 | U2.29_1 12,53.15 13.14,53.15 U2.29_4 13.21,53.15 14.35,53.15 U2.29_7 | U2.29_5 13.14,54.42 12,54.42 U2.29_2 | U2.29_6 13.14,55.56 13.14,54.48 U2.29_5 | U2.29_5 13.21,54.42 14.35,54.42 U2.29_8 14.41,54.42 14.41,55.56 U2.29_9 14.48,55.56 v17.91,55.56 | U2.1 7.49,47.18 7.49,48.7 11.87,53.09 U2.29_1 | C2.2 66.48,108.08 65.34,108.08 65.28,108.14 RESET_BUTTON1.2 65.22,108.2 61.78,108.2 RESET_BUTTON1.1 61.72,108.2 61.28,108.65 58.99,108.65 58.42,108.08 v58.17,108.08 52.58,108.08 C6.2 52.51,108.08 51.37,108.08 51.31,108.14 CHANGE_BUTTON.2 51.24,108.2 47.82,108.2 CHANGE_BUTTON.1 47.75,108.2 46.99,108.2 46.55,108.65 29.08,108.65 28.77,108.33 27.88,108.33 27.69,108.52 26.23,108.52 25.91,108.2 BOOT_BUTTON.2 25.84,108.2 22.42,108.2 BOOT_BUTTON.1 22.35,108.14 22.29,108.08 21.02,108.08 C1.2 20.95,108.01 15.81,108.01 8.83,101.03 C9.2 8.76,101.03 6.35,101.03 EPD_C6.2 6.35,100.77 2.29,96.71 2.29,96.08 J4.G4 2.29,96.01 2.29,95.69 4.7,93.28 4.83,93.28 J4.P6 4.64,93.28 1.27,89.92 1.27,82.93 J4.G3 1.27,82.87 7.49,82.87 | D6.2 13.46,99.5 13.46,93.6 15.43,91.63 J4.G2 15.43,91.57 14.67,90.8 14.67,87.76 15.43,86.99 15.43,85.98 J4.G1 15.37,85.98 12.26,82.87 7.49,82.87 | v58.17,106.55 58.17,102.68 | 120.08,35.37 120.08,36.51 120.81,37.24 | 120.08,35.37 120.08,34.29 EPD_C11.2 | 120.81,37.24 121.67,38.1 IC4.2 | 120.08,35.37 128.27,35.37 C3.-
  Top 0.127: U4.9 137.16,53.28 136.53,52.64 136.21,52.64 U4.4 136.14,52.58 136.14,49.72 133.86,47.44 132.84,47.44 128.62,51.66 | U4.9 137.16,53.4 136.53,54.04 136.21,54.04 U4.1 | U4.6 138.11,53.15 137.1,53.15 U4.9 | 118.52,39.47 124.59,45.53 126.68,45.53 126.94,45.78 126.94,48.77 126.24,49.47 126.24,50.23 | 118.52,39.47 117.86,38.8 116.84,38.8 R1_PWRUSB.1 | 126.24,50.23 126.81,50.8 MCP73831.2 127.76,50.8 128.62,51.66 | C5_USB.2 125.67,50.8 126.24,50.23 | 128.62,51.66 129.6,52.64 130.81,52.64 R2_BAT.1 | v120.71,37.27 120.78,37.27 120.81,37.24 | v118.56,39.43 118.52,39.47 | SENSOR2.5 157.42,12.51 157.42,12.32 156.91,11.81 156.27,11.81 155.83,12.26 155.83,12.51 SENSOR2.7 155.83,12.19 155.7,12.19 155.32,11.81 154.69,11.81 154.56,11.94 154.56,14.92 155,15.37 SENSOR2.1 155.07,15.43 155.07,15.68 156.15,16.76 156.21,16.76 | R4.1 153.67,5.14 154.31,4.51 157.42,4.51 158.43,5.52 158.43,15.49 158.4,15.53 | 158.4,15.53 157.16,16.76 156.21,16.76 | 158.4,15.53 160.4,17.53 165.23,17.53 J3.1 | J2.MP2 168.91,59.75 165.04,59.75 J2.MP4 164.97,59.69 164.47,59.18 164.47,57.97 J2.A12 164.47,57.91 164.47,57.72 J2.B1 164.4,57.59 163.33,57.59 158.98,53.24 | J2.MP1 168.91,49.53 165.04,49.53 J2.MP3 164.97,49.53 164.47,50.04 164.47,51.24 J2.A1 164.47,51.31 164.47,51.5 J2.B12 163.35,51.56 163.17,51.38 160.83,51.38 158.98,53.24 | 156.84,45.72 156.84,45.91 156.15,46.61 156.15,48.07 154.69,49.53 D1.2 | 158.75,53.47 157.73,53.47 155.26,50.99 155.26,50.04 154.75,49.53 D1.2 | 158.75,53.47 158.98,53.24 | 158.75,53.47 C10.2 | 156.21,16.76 156.21,45.08 156.84,45.72 | 156.84,45.72 EPD_C5.1 | D1.2 154.18,49.53 153.61,50.1 153.61,51.05 150.24,54.42 137.6,54.42 136.91,53.72 U4.9
  Top 0.127: 55.88,38.1 55.88,38.61 55.18,39.31 55.18,40.64 55.88,41.34 D10.2 55.88,42.48 63.37,49.97 84.84,49.97 85.72,50.86 U3.13 | 55.88,38.1 EPD_C1.1 | C1_BAT1.2 53.34,36.39 54.48,37.53 54.48,38.1 | 54.48,38.1 54.48,40.2 53.34,41.34 D9.2 53.34,41.4 48.26,41.4 | v55.18,38.1 55.88,38.1 | 54.48,38.1 v54.29,38.1 | 34.48,55.24 34.92,55.24 U5.9 | 34.48,55.24 U5.4 32.89,55.24 32.51,55.63 v32.13,55.63 | 34.48,55.24 34.48,51.37 35.56,50.29 D11.2 35.56,50.04 36.39,50.04 45.02,41.4 48.26,41.4 | 48.26,41.4 D8.2 | J1.MP1 91.82,12.95 91.82,16.64 89.72,18.73 89.72,19.75 89.03,20.45 R2.1 | 88.46,25.4 88.46,21.02 88.96,20.51 R2.1 | 87.38,16.7 87.38,18.8 87.57,18.99 R2-USB1.1 87.57,19.05 | 87.38,16.7 87.38,15.43 J1.8 | 87.57,19.05 86.36,20.26 C1_BAT2.2 86.36,20.51 83.25,23.62 83.25,24.13 EPD_C8.2 | 87.38,16.7 83.76,16.7 82.87,15.81 82.87,15.43 J1.17 82.8,15.37 82.8,15.05 81.98,14.22 79.31,14.22 78.36,13.27 78.36,12.95 J1.MP2 78.3,12.89 71.82,12.89 71.12,12.19 EPD_C10.2 71.12,12.13 69.94,13.3 | 87.57,19.05 88.96,20.45 R2.1 | EPD_C7.2 81.85,20.51 80.9,20.51 EPD_C9.2 80.9,20.57 80.9,20.96 v80.64,21.21 | C4_USB.2 74.93,26.1 76.2,26.1 R2-USB.2 76.2,26.04 76.9,25.34 76.9,24.32 76.71,24.13 76.71,23.5 78.17,22.03 78.17,21.59 D12.2 | v79.12,21.21 78.61,21.21 78.23,21.59 D12.2 | C1_BAT.2 73.66,19.75 72.39,19.75 C2_BAT.2 72.39,19.68 71.69,18.99 71.69,17.97 72.96,16.7 72.96,16.51 | 69.94,13.3 69.85,13.4 | 69.85,13.4 69.28,13.97 C7.2 | SJ1.1 67.82,11.49 v69.03,12.7 | 69.94,13.3 v69.91,13.27 69.85,13.4 | 69.85,13.4 72.96,16.51 | 72.96,16.51 C_DELAY.2 73.03,16.51 73.72,15.81 74.74,15.81 78.55,19.62 78.55,21.21 D12.2
  Top 0.127: 91.69,62.93 88.9,62.93 88.33,63.5 C5.2 | 91.69,62.93 92.71,62.93 EPD_C2.1 | U3.13 85.72,50.93 88.27,48.39 88.27,48.26 C8.2 88.33,48.26 88.33,44.01 94.17,38.16 94.17,34.99 93.98,34.8 v93.98,31.88 EPD_C12.2 | 91.28,56.1 91,56.39 90.55,56.39 85.72,51.56 U3.13 | 91.28,56.1 94.17,53.21 95.25,53.21 C10_SUPERCAP.1 | v91.69,59.69 91.69,62.93 | 91.28,56.1 v91.38,56.2 | v88.46,26.16 88.46,25.4 | 88.46,25.4 D3.1
  Bottom 0.127: v58.17,108.08 v58.17,106.55 | v120.71,37.27 v118.56,39.43 118.56,39.37 116.2,39.37 108.71,31.88 v93.98,31.88 88.46,26.35 v88.46,26.16 | v54.29,38.1 v55.18,38.1 | v79.12,21.21 v80.64,21.21 | v69.03,12.7 69.34,12.7 v69.91,13.27 | v91.69,59.69 91.69,56.52 v91.38,56.2 | v17.91,55.56 32.07,55.56 v32.13,55.63
  pour Top: -13.37,119.38 -13.35,119.33 -13.35,-14.05 199.35,-14.05 199.35,121.15 -15.14,121.15
  pour Bottom: -8.87,127.38 -8.85,127.33 -8.85,-8.55 193.35,-8.55 193.35,127.65 -9.14,127.65
GPIO8
  Top 0.127: R1.2 19.11,44.51 19.11,46.93 18.92,47.12 U2.10
I2C_PW  (via drill 0.3)
  Top 0.127: v101.85,7.68 90.55,18.99 R2_PINH.2 90.61,18.99 v91.31,19.68 | v156.84,7.68 157.48,7.05 RI_PINH.2 | v24.83,108.97 21.59,108.97 21.21,109.35 21.02,109.35 C1.1 | v64.14,109.28 64.45,108.97 66.1,108.97 66.48,109.35 C2.1 | v29.02,73.98 28.83,73.98 21.46,66.61 21.46,64.64 U2.17 | v93.28,26.73 93.28,34.48 93.92,35.12 93.92,35.5 85.66,43.75 v80.77,43.75
  Bottom 0.127: v156.84,7.68 v101.85,7.68 | v24.83,108.97 27.11,108.97 27.81,109.66 29.02,109.66 | 29.02,109.66 43.94,109.66 44.64,108.97 47.56,108.97 48.7,110.11 63.31,110.11 v64.14,109.28 81.09,92.33 81.09,66.1 79.82,64.83 79.82,55.88 80.77,54.93 v80.77,43.75 | 29.02,109.66 v29.02,73.98 | v91.31,19.68 91.31,19.88 91.25,19.94 91.25,24.7 v93.28,26.73
IC2_PW
  Top 0.127: 155.83,13.27 156.08,13.27 156.59,12.76 156.59,12.57 SENSOR2.6 | 155.83,13.27 155.57,13.27 155.07,12.76 155.07,12.57 SENSOR2.8 | 155.83,13.27 155.83,15.37 SENSOR2.2
INT_RTC  (via drill 0.3)
  Top 0.127: v43.05,42.73 48.26,37.53 R1_PINH1.1 | v17.27,45.97 16.38,46.86 16.38,47.12 U2.8 | v93.53,52.58 93.53,50.93 106.3,38.16 106.3,5.84 TP15.TP | v88.52,57.59 88.52,58.67 87,60.2 U3.3 | v49.15,48.83 61.85,48.83 68.2,55.18 v86.17,55.18
  Bottom 0.127: v17.27,45.97 19.3,45.97 22.54,42.73 v43.05,42.73 v49.15,48.83 | v93.53,52.58 v88.52,57.59 88.52,57.53 v86.17,55.18
IO/BOOT  (via drill 0.3)
  Top 0.127: 28.57,109.92 26.1,109.92 25.91,109.73 BOOT_BUTTON.3 25.84,109.73 22.42,109.73 BOOT_BUTTON.4 | 28.57,109.92 46.55,109.92 46.67,109.79 46.67,109.28 46.99,108.97 52.13,108.97 52.51,109.35 C6.1 | v84.07,19.75 83.5,19.18 83.12,19.18 R_BOOT.1 | v80.58,29.15 77.53,29.15 v77.09,28.7 | v42.74,63.05 38.42,63.05 36.89,64.58 28.57,64.58 | 28.57,64.58 24,64.58 U2.15 | v28.57,108.77 28.57,109.92 | 28.57,64.58 v28.57,66.23
  Bottom 0.127: v84.07,19.75 84.07,20.19 84.9,21.02 84.9,24.83 v80.58,29.15 | v42.74,63.05 v77.09,28.7 | v28.57,66.23 v28.57,108.77
IO/CHANGE  (via drill 0.3)
  Top 0.127: v119.13,52.07 R_CHANGE.1 | v157.92,53.02 C10.1 | 48.9,109.73 51.24,109.73 CHANGE_BUTTON.3 | 48.9,109.73 47.82,109.73 CHANGE_BUTTON.4 | 48.9,109.73 v48.9,109.66 | U2.23 13.84,64.64 13.84,67.82 v31.11,85.09 32.19,85.09 35.12,88.01 39.43,88.01 53.09,74.36 v81.53,74.36
  Bottom 0.127: v157.92,53.02 156.53,54.42 129.41,54.42 127.06,52.07 v119.13,52.07 103.82,52.07 v81.53,74.36 | v31.11,85.09 31.11,91.88 v48.9,109.66
MISO  (via drill 0.3)
  Top 0.127: v75.06,21.59 D12.1 | v35.05,17.4 34.61,17.4 33.91,16.7 TP6.TP | 32.92,60.04 30.8,62.17 10.92,62.17 8.76,64.33 8.76,64.58 U2.27 8.7,64.64 v8.7,82.42 | 32.92,60.04 33.66,59.31 33.66,58.8 32.96,58.1 32.96,57.78 U5.2 | v44.83,109.41 45.97,109.41 R8.1 | v6.22,95.19 5.4,94.36 5.08,94.36 J4.P7 | v39.18,41.59 39.18,41.85 30.99,50.04 30.99,58.1 32.92,60.04
  Bottom 0.127: v75.06,21.59 39.24,21.59 39.21,21.56 | v35.05,17.4 39.21,21.56 | v44.83,109.41 44.58,109.41 44.07,109.92 20.95,109.92 v6.22,95.19 6.29,95.19 6.29,93.85 8.7,91.44 v8.7,82.42 | v39.18,41.59 39.18,21.59 39.21,21.56
MOSI  (via drill 0.3)
  Top 0.127: v84.33,14.29 84.33,15.37 J1.14 | v108.39,10.92 124.52,10.92 129.03,6.41 TP7.TP | v34.92,52.39 35.62,51.69 D11.1 35.56,51.56 39.24,55.24 U5.5 40.77,55.24 54.74,41.28 54.74,32.51 67.63,19.62 v67.63,17.27 | U2.7 15.11,47.18 15.11,47.44 v19.68,52.01 19.62,52.01 v19.62,56.01 | v28,109.22 27.18,109.22 R7.1 | J4.P3 5.08,89.98 5.4,89.98 6.73,91.31 v10.1,91.31 v10.1,90.04
  Bottom 0.127: 85.12,13.49 87.69,10.92 v108.39,10.92 | 85.12,13.49 v84.33,14.29 | v19.68,52.01 34.54,52.01 v34.92,52.39 | v10.1,91.31 v28,109.22 | v19.62,56.01 19.62,58.93 12.45,66.1 12.45,87.69 v10.1,90.04 | 85.12,13.49 82.42,10.8 74.11,10.8 v67.63,17.27
N$1  (via drill 0.3)
  Top 0.127: v93.47,35.31 80.52,35.31 73.98,28.77 73.98,24.57 74.36,24.19 75.5,24.19 76.01,24.7 76.2,24.7 R2-USB.1 | v163.45,55.94 163.83,56.33 164.4,56.33 J2.B5
  Bottom 0.127: v93.47,35.31 110.87,35.31 122.17,46.61 122.17,47.24 124.14,49.21 156.72,49.21 v163.45,55.94
N$2  (via drill 0.3)
  Top 0.127: v101.73,42.1 101.73,31.43 95.06,24.77 91.25,24.77 89.41,26.61 88.27,26.61 87.63,25.97 87.63,20.38 R2-USB1.2 | v160.21,53.34 164.4,53.34 J2.A5
  Bottom 0.127: v101.73,42.1 116.65,42.1 124.02,49.47 156.34,49.47 v160.21,53.34
N$10  (via drill 0.3)
  Top 0.127: C4_USB.1 74.93,24.96 74.23,25.65 74.23,26.48 77.47,29.72 v85.85,29.72 | v120.02,49.66 120.02,50.8 C5_USB.1
  Bottom 0.127: v85.85,29.72 86.11,29.72 101.41,45.02 115.38,45.02 v120.02,49.66
N$12
  Top 0.127: R1_PWRUSB.2 116.84,37.47 117.73,37.47 119.38,39.12 D2.2 119.38,39.18 120.27,40.07 121.6,40.07 127.51,45.97 132.4,45.97 Q1.1
N$13  (via drill 0.3)
  Top 0.127: 122.46,37.69 122.49,37.72 122.49,38.48 121.98,38.99 121.79,38.99 IC4.1 121.73,38.99 121.28,38.99 119.38,37.08 D2.1 v119.38,21.27 | 122.46,37.69 121.98,37.21 121.79,37.21 IC4.3 | v134.24,45.08 134.24,45.97 Q1.2 | v130.94,41.78 130.94,38.61 129.41,37.08 125.73,37.08 125.16,37.66 122.49,37.66 122.46,37.69 | C1_BAT1.1 53.34,37.27 52.64,36.58 52.64,33.21 v66.29,19.56
  Bottom 0.127: v130.94,41.78 v134.24,45.08 | v66.29,19.56 66.29,17.65 71.56,12.38 72.14,12.38 74.04,10.48 108.58,10.48 v119.38,21.27
N$14
  Top 0.127: R1_BAT.1 156.21,5.71 156.02,5.71 155.32,6.41 153.16,6.41 131.38,28.19 131.38,43.81 133.03,45.47 133.03,46.48 129.67,49.85 127.06,49.85 MCP73831.1
N$16  (via drill 0.3)
  Top 0.127: C4.2 92.71,45.85 v91.63,44.77 | v81.72,34.86 81.41,34.86 80.83,34.29 D5.2 80.9,34.29 82.55,32.64 L1.1
  Bottom 0.127: v81.72,34.86 v91.63,44.77
N$17
  Top 0.127: C4.1 92.71,52.52 91.19,50.99 91.19,42.29 95.57,37.91 95.57,25.65 95.31,25.4 91.95,25.4 | 91.95,25.4 91.95,29.21 D4.1 | 91.95,25.4 D3.2
N$18  (via drill 0.3)
  Top 0.127: v123.64,48.07 120.97,48.07 119.44,49.59 119.44,51.37 119.89,51.82 119.89,52.07 CHG_LED.C | v154.31,25.91 154.31,9.97 156.21,8.07 R1_BAT.2
  Bottom 0.127: v123.64,48.07 123.76,48.07 130.49,41.34 138.88,41.34 v154.31,25.91
N$19  (via drill 0.3)
  Top 0.127: MCP73831.4 124.4,51.75 124.08,52.07 CHG_LED.A 121.35,52.07 120.78,51.5 v120.65,51.5 | v87.88,46.16 86.55,44.83 81.22,44.83 73.72,37.34 73.72,24.45 74.61,23.56 74.61,19.18 73.85,18.41 73.66,18.41 C1_BAT.1
  Bottom 0.127: v87.88,46.16 88.14,46.16 92.46,50.48 119.63,50.48 v120.65,51.5
N$20  (via drill 0.3)
  Top 0.127: v129.6,53.97 130.81,53.97 R2_BAT.2 | v125.54,49.91 124.46,49.91 MCP73831.5
  Bottom 0.127: v125.54,49.91 v129.6,53.97
N$22  (via drill 0.3)
  Top 0.127: v82.04,12.26 82.23,12.45 86.74,12.45 89.28,14.99 89.28,15.37 J1.4 | v69.85,17.4 69.85,17.78 55.88,31.75 EPD_C1.2
  Bottom 0.127: v82.04,12.26 81.92,12.26 81.22,11.56 75.69,11.56 v69.85,17.4
N$23  (via drill 0.3)
  Top 0.127: v88.9,18.41 88.9,15.43 J1.5 | v94.68,30.48 94.68,38.04 90.42,42.29 90.42,55.56 v90.81,55.94 | v92.14,60.83 92.14,60.96 92.71,61.53 EPD_C2.2
  Bottom 0.127: v88.9,18.41 88.9,22.73 92.84,26.67 92.84,28.64 v94.68,30.48 | v90.81,55.94 90.81,59.5 v92.14,60.83
N$24  (via drill 0.3)
  Top 0.127: v82.3,18.41 82.3,15.43 J1.18 | v41.27,67.44 33.34,67.44 v28.13,72.64 | v6.73,94.04 6.73,99.25 6.35,99.63 EPD_C6.1
  Bottom 0.127: v82.3,18.41 82.3,21.53 41.27,62.55 v41.27,67.44 | v6.73,94.04 v28.13,72.64
N$26
  Top 0.127: J1.19 81.85,15.43 81.85,19.11 EPD_C7.1
N$29
  Top 0.127: J1.20 81.28,15.43 81.28,17.65 80.2,18.73 80.2,22.48 81.85,24.13 EPD_C8.1
N$30
  Top 0.127: J1.22 80.33,15.37 80.33,15.05 79.76,14.48 72.2,14.48 71.12,13.4 EPD_C10.1
N$31  (via drill 0.3)
  Top 0.127: v79.25,18.73 79.31,18.67 79.31,15.43 J1.24 | v94.68,29.21 94.55,29.21 93.98,29.78 EPD_C12.1
  Bottom 0.127: v79.25,18.73 81.34,18.73 82.11,17.97 83.76,17.97 90.87,25.08 90.87,27.31 94.49,30.92 94.87,30.92 95.12,30.67 95.12,29.65 v94.68,29.21
N$32  (via drill 0.3)
  Top 0.127: v73.28,17.53 74.3,16.51 C_DELAY.1 | v73.28,21.15 73.28,24.13 72.58,24.83 v72.58,45.28 | v51.75,105.16 51.05,105.16 50.99,105.09 IC1.5
  Bottom 0.127: v73.28,21.15 v73.28,17.53 | v72.58,45.28 72.58,69.72 51.75,90.55 v51.75,105.16
N$45  (via drill 0.3)
  Top 0.127: R_CAPACITOR.1 132.08,44.13 133.29,45.34 133.29,46.61 128.91,50.99 v128.65,50.99 | v128.14,51.82 113.92,66.04 D7.1
  Bottom 0.127: v128.65,50.99 128.65,51.31 v128.14,51.82
PREVGH
  Top 0.127: 82.52,24.61 82.61,24.51 82.61,22.8 84.01,21.4 84.01,20.32 83.44,19.75 81.34,19.75 80.9,19.3 80.9,19.18 EPD_C9.1 | 82.52,24.61 82.3,24.83 81.47,24.83 79.95,23.31 79.95,18.61 80.83,17.72 J1.21 | 82.52,24.61 82.74,24.83 84.26,24.83 86.55,27.11 86.55,31.31 84.33,33.53 84.33,34.29 D5.1
PREVGL  (via drill 0.3)
  Top 0.127: 88.36,31.53 88.39,31.5 88.39,29.21 D4.2 | 88.36,31.53 84.96,34.92 83.63,34.92 83.5,34.8 83.5,33.78 83.63,33.66 83.82,33.66 86.3,31.18 86.3,27.24 85.28,26.22 82.49,26.22 79.69,23.43 79.69,18.48 79.82,18.35 79.82,15.43 J1.23 | v106.74,34.29 EPD_C11.1 | 88.36,31.53 90.89,34.06 v91.92,34.06
  Bottom 0.127: v106.74,34.29 92.15,34.29 v91.92,34.06
RESE  (via drill 0.3)
  Top 0.127: v82.61,12 86.74,12 89.79,15.05 89.79,15.37 J1.3 89.85,15.43 89.85,15.81 v90.23,16.19 | v70.8,15.81 70.8,16.45 70.55,16.7 Q3.2 | R3.1 145.73,46.99 142.05,43.31 142.05,37.15 v133.35,28.45 | v118.3,28.45 115.51,28.45 v106.74,19.68
  Bottom 0.127: v82.61,12 82.42,12 81.72,11.3 75.31,11.3 v70.8,15.81 | v118.3,28.45 v133.35,28.45 | v106.74,19.68 95.31,19.68 91.82,16.19 v90.23,16.19
RESET  (via drill 0.3)
  Top 0.127: v49.85,105.09 IC1.1 | v54.1,109.35 60.07,109.35 R_RESET.1 60.13,109.41 60.39,109.66 61.72,109.66 RESET_BUTTON1.4 61.78,109.73 65.22,109.73 RESET_BUTTON1.3 | C5.1 83.44,63.5 v80.64,66.29 | v24.7,61.72 15.49,52.52 14.35,52.52 10.03,48.2 10.03,47.18 U2.3
  Bottom 0.127: v54.1,109.35 51.15,106.39 | 51.15,106.39 v49.85,105.09 40.07,95.31 40.07,77.09 v24.7,61.72 | v80.64,66.29 80.64,76.9 51.15,106.39
RTC_RST  (via drill 0.3)
  Top 0.127: v84.2,62.61 38.48,62.61 37.53,63.56 23.5,63.56 22.73,64.33 22.73,64.58 U2.16 | v85.09,61.72 85.09,61.21 85.72,60.58 U3.4
  Bottom 0.127: v85.09,61.72 v84.2,62.61
RX  (via drill 0.3)
  Top 0.127: v13.4,65.79 12.57,64.96 12.57,64.64 U2.24 | v27.5,65.79 28.7,66.99 91.89,66.99 92.33,66.55 149.35,66.55 TP2.TP
  Bottom 0.127: v27.5,65.79 v13.4,65.79
SCK  (via drill 0.3)
  Top 0.127: 84.8,14.13 84.01,13.34 v79.06,13.34 | 84.8,14.13 84.84,14.16 84.84,15.37 J1.13 | v71.12,16.95 71.12,24.64 55.88,39.88 D10.1 55.88,39.94 56.58,40.64 56.58,42.04 v56.33,42.29 | v131.83,36.7 140.59,36.7 141.54,37.66 141.54,43.56 148.59,50.61 151.57,50.61 R6.1 | v85.15,14.1 84.84,14.1 84.8,14.13 | U5.6 v42.1,56.52 42.8,57.21 v43.5,57.21 | v20.89,43.75 16.95,43.75 13.84,46.86 13.84,47.12 U2.6 13.78,47.18 13.78,47.37 v12.45,48.7 | v6.22,92.08 5.08,92.08 J4.P5 | v47.5,80.58 47.5,86.36 TP8.TP
  Bottom 0.127: v79.06,13.34 74.74,13.34 v71.12,16.95 | v131.83,36.7 125.92,36.7 100.39,11.18 88.08,11.18 v85.15,14.1 | v56.33,42.29 49.82,48.8 | 49.82,48.8 v42.1,56.52 | v20.89,43.75 21.14,43.75 22.61,42.29 43.31,42.29 49.82,48.8 | v6.22,92.08 6.22,67.06 12.45,60.83 v12.45,48.7 | v47.5,80.58 47.5,74.3 40.83,67.63 40.83,59.88 v43.5,57.21
SCL  (via drill 0.3)
  Top 0.127: v156.97,16.32 156.97,16.07 157.35,15.68 157.35,15.43 SENSOR2.4 | U4.7 138.18,53.53 138.49,53.53 140.65,51.37 v140.65,38.93 v139.38,37.66 | v91.69,20.13 91.5,20.32 R2_PINH.1 | v36.13,60.13 33.85,62.42 19.56,62.42 17.65,64.33 17.65,64.58 U2.20 | v39.5,56.77 40.58,55.69 80.01,55.69 80.07,55.63 86.55,55.63 v87.82,54.36 | v90.87,51.31 90.87,42.23 95.12,37.97 v95.12,25.84
  Bottom 0.127: v140.65,38.93 156.97,22.61 v156.97,16.32 | 95.12,20.13 108.97,20.13 126.49,37.66 v139.38,37.66 | 95.12,20.13 v91.69,20.13 | v39.5,56.77 v36.13,60.13 | v90.87,51.31 v87.82,54.36 | 95.12,20.13 v95.12,25.84
SDA  (via drill 0.3)
  Top 0.127: v141.1,37.85 141.1,51.44 138.49,54.04 138.18,54.04 U4.8 | v156.34,16.32 156.34,15.68 156.59,15.43 SENSOR2.3 156.66,15.37 156.66,15.18 158.18,13.65 158.18,6.6 157.48,5.91 RI_PINH.1 | v123.76,46.99 105.92,46.99 96.27,56.64 82.93,56.64 80.07,59.5 39.75,59.5 36.58,62.67 20.57,62.67 18.92,64.33 18.92,64.58 U2.19
  Bottom 0.127: v156.34,16.32 141.1,31.56 v141.1,37.85 140.4,38.55 132.91,38.55 124.46,46.99 v123.76,46.99
SS_SD  (via drill 0.3)
  Top 0.127: v5.78,83.31 6.03,83.57 6.03,88.14 5.52,88.65 5.52,88.77 J4.P2 | v10.73,48.26 10.73,47.69 11.24,47.18 U2.4 | R10.1 154.94,5.4 v154.5,4.95 | v99.76,4.95 92.9,11.81 88.71,11.81 88.46,12.07 87.57,12.07 86.81,11.3 81.72,11.3 v81.03,12 | D8.1 48.26,39.88 v49.47,38.67 49.4,38.67 49.4,37.53 48.77,36.89 47.75,36.89 41.72,42.93 v41.72,43.18
  Bottom 0.127: v5.78,83.31 5.78,67.12 10.73,62.17 v10.73,48.26 17.84,48.26 18.29,47.82 29.53,47.82 32,50.29 34.61,50.29 v41.72,43.18 | v99.76,4.95 v154.5,4.95 | v81.03,12 81.03,15.94 77.6,19.37 77.6,23.88 62.8,38.67 v49.47,38.67
TX
  Top 0.127: TP1.TP 11.3,65.91 11.3,64.64 U2.25
USB_D+  (via drill 0.3)
  Top 0.127: v38.86,63.5 42.1,66.74 89.15,66.74 89.6,66.29 147.51,66.29 154.37,59.44 154.37,50.48 D1.1 | v29.59,52.45 29.27,52.45 24,47.18 U2.14
  Bottom 0.127: v38.86,63.5 32.58,57.21 32.58,55.44 v29.59,52.45
USB_D-  (via drill 0.3)
  Top 0.127: v132.27,28 141.8,37.53 141.8,43.43 146.94,48.58 154.37,48.58 D1.3 | v95.31,10.03 95.06,10.03 93.03,12.07 88.84,12.07 88.58,12.32 87.44,12.32 86.68,11.56 82.11,11.56 81.22,12.45 79.12,12.45 78.17,11.49 70.55,11.49 70.17,11.88 70.17,12.19 69.09,13.27 67.5,13.27 67.18,13.59 67.18,18.03 49.85,35.37 34.23,35.37 22.73,46.86 22.73,47.12 U2.13
  Bottom 0.127: v132.27,28 126.75,28 108.84,10.1 95.38,10.1 v95.31,10.03
VBAT
  Top 0.3: Q1.3 133.35,50.67 135.7,53.02 136.08,53.02 U4.3 136.18,53.52 136.21,53.56 U4.2 136.08,53.66 135.7,53.66 135.51,53.85 135.51,54.36 142.11,60.96 TP3.TP
VBBAT  (via drill 0.3)
  Top 0.127: v86.36,45.28 81.28,45.28 72.83,36.83 72.83,24.96 74.36,23.43 74.36,19.3 74.17,19.11 73.28,19.11 72.58,18.41 72.39,18.41 C2_BAT.1 | v126.05,51.05 126.68,51.69 127,51.69 MCP73831.3
  Bottom 0.127: v86.36,45.28 115,45.28 120.78,51.05 v126.05,51.05
VBUS
  Top 0.3: TP14.TP 113.73,6.35 119.25,6.35 120.52,7.62 126.05,7.62 129.54,4.13 157.54,4.13 166.24,12.83 166.24,32.89 157.23,41.91 PFMF.050.1.2
VRTC  (via drill 0.3)
  Top 0.127: v132.78,38.1 132.72,38.1 132.08,37.47 R_CAPACITOR.2 | v115.57,39.37 106.81,39.37 95.25,50.93 | v86.93,49.08 86.93,48.26 C8.1 | 95.25,50.93 v94.17,50.93 | 95.25,50.93 C10_SUPERCAP.2
  Bottom 0.127: v132.78,38.1 120.52,38.1 118.75,39.88 116.08,39.88 v115.57,39.37 | v86.93,49.08 90.68,49.08 92.52,50.93 v94.17,50.93
VUSB  (via drill 0.3)
  Top 0.3: PFMF.050.1.1 155.08,44.3 v155.5,44.3 | J2.A4 163.26,52.06 v163,51.8
  Bottom 0.3: v155.5,44.3 160.5,44.3 162.5,46.3 162.5,51.3 v163,51.8